# Altium PCB pneu-io.PcbDoc
Units mil, origin at the board's own origin, x right, y up, seen from the top; angles counter-clockwise.
Board outline 1200 x 2000 mil, 2 copper layers (Top, Bottom); 27 components, 28 nets, 114 pads, 76 vias.
Unrouted connection lines stored in the file: 14.
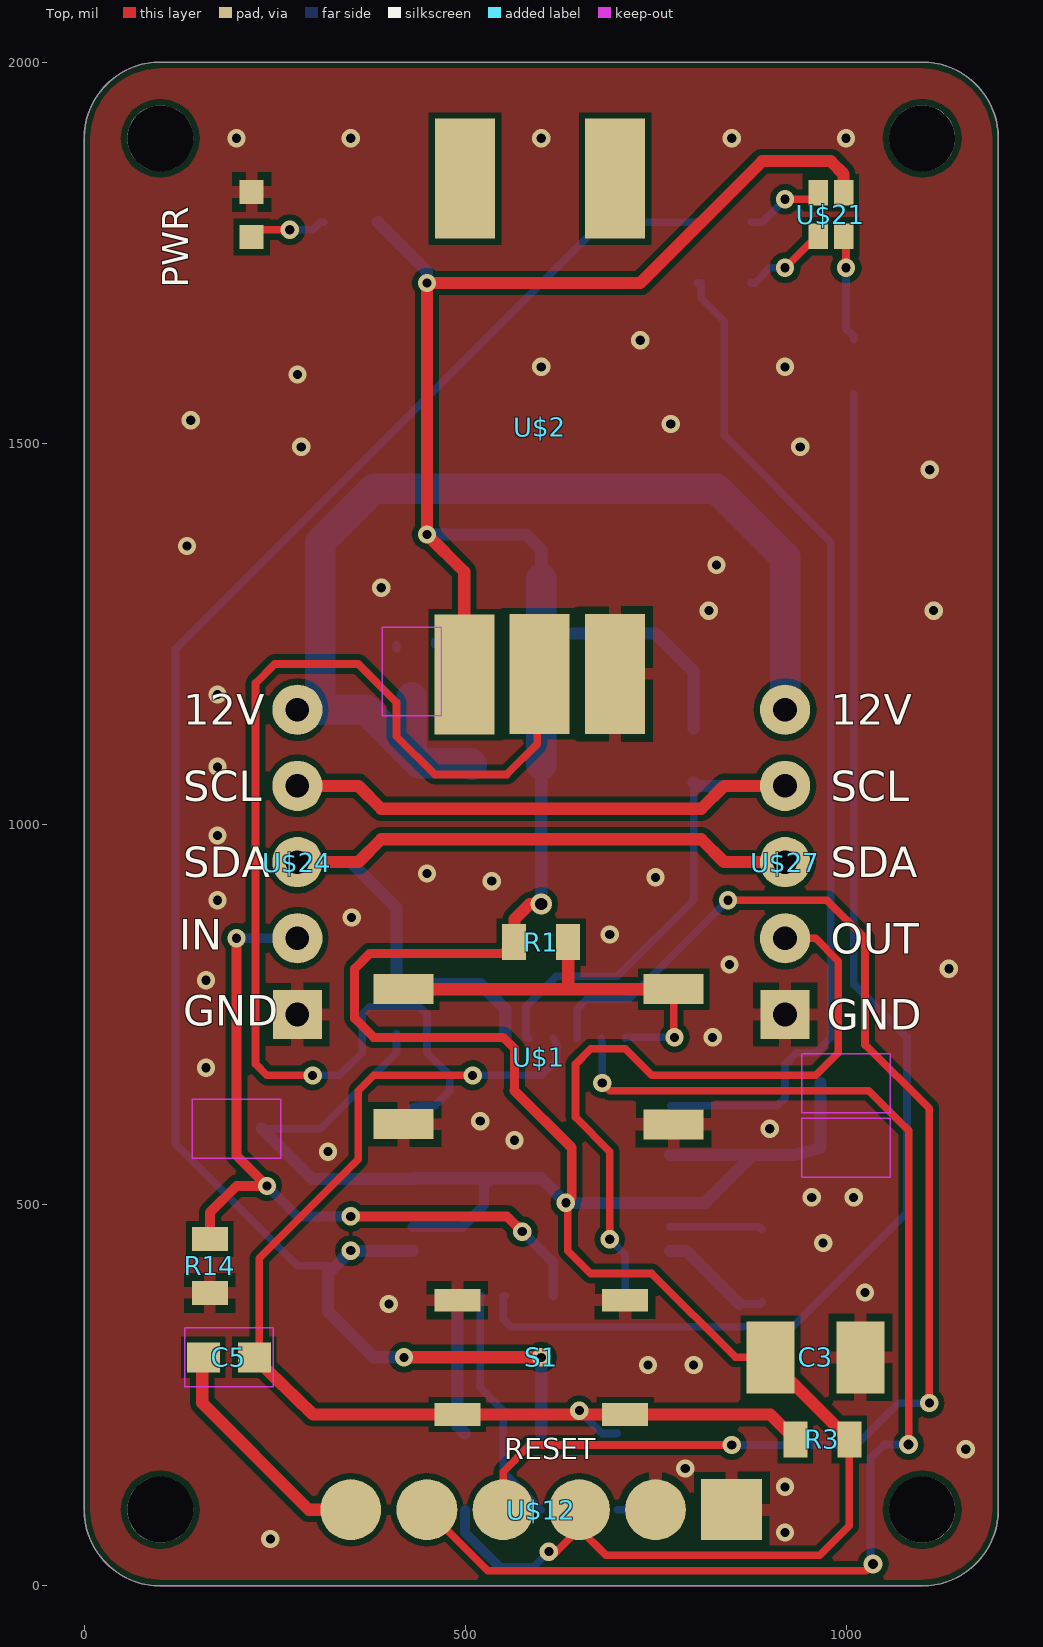
[diagram p0: Top view]
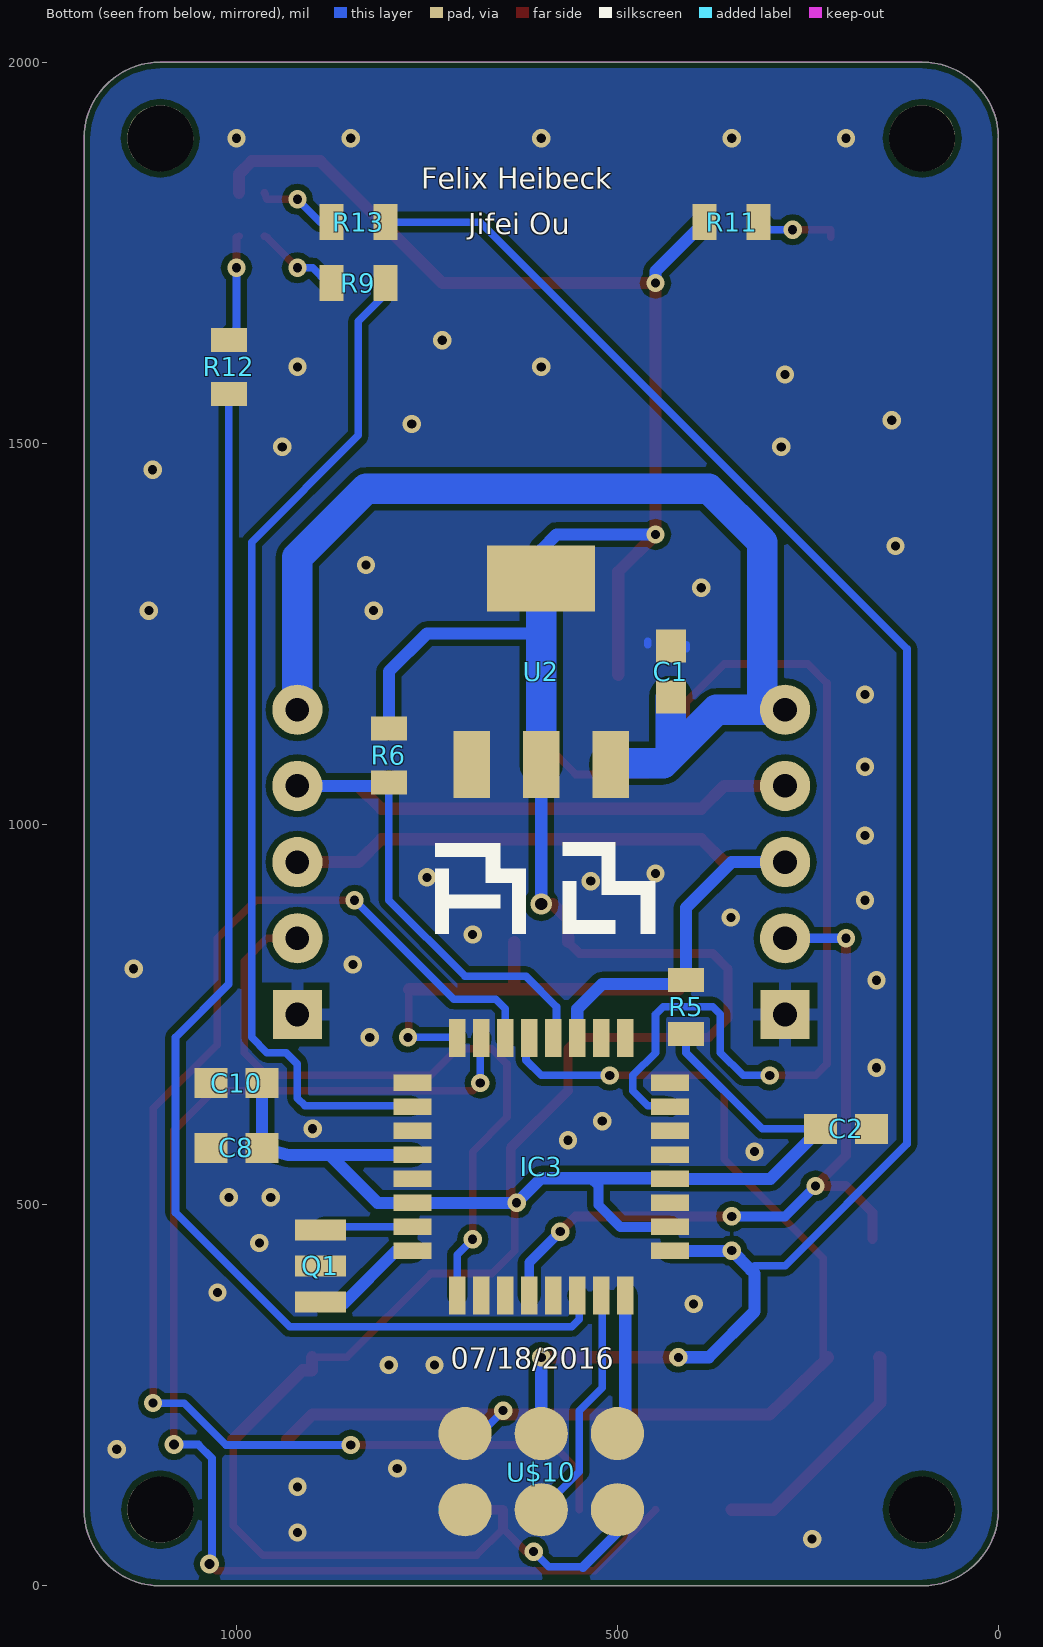
[diagram p1: Bottom view, seen from below]

## Layer stack, top to bottom
Top Solder: solder mask 0.4, Solder Resist, Dk 3.5
Top: signal copper 1.378
Dielectric 1: dielectric 12.6, FR-4, Dk 4.8
Bottom: signal copper 1.378
Bottom Solder: solder mask 0.4, Solder Resist, Dk 3.5

## Board outline
100,0 1100,0 ccw(c1100,100) 1200,100 1200,1900 ccw(c1100,1900) 1100,2000 100,2000 ccw(c100,1900) 0,1900 0,100 ccw(c100,100)

## Design rules (kind name [scope] priority, off if disabled: settings)
Clearance "Clearance (Same Net)" [All] p1: gap=8 ignorepadtopadclearanceinfootprint=FALSE except(0: SMDPad-SMDPad SMDPad-THPad SMDPad-Via)
Clearance [All] p2: gap=8 ignorepadtopadclearanceinfootprint=FALSE
HoleSize HoleSize_For_NetClass_vcc [InNetClass('vcc')] p1: absolutevalues=TRUE maxlimit=0 minlimit=0 maxpercent=80.000 minpercent=20.000
HoleSize [All] p2: absolutevalues=TRUE maxlimit=100000 minlimit=12 maxpercent=80.000 minpercent=20.000
HoleToHoleClearance mdDrill [All] p1: gap=10 allowstackedmicrovias=TRUE
PasteMaskExpansion mlMinCreamFrame [All] p1: expansion=0
PolygonConnect ThermalVias [IsVia] p1: connectstyle=Direct reliefconductorwidth=10 reliefentries=4 polygonreliefangle="90 Angle" airgapwidth=10
PolygonConnect [All] p2: connectstyle=Relief reliefconductorwidth=16 reliefentries=4 polygonreliefangle="90 Angle" airgapwidth=10
RoutingVias [All] p1: holewidth=12 width=24 viastyle="Through Hole" minholewidth=12 minwidth=24 maxholewidth=100 maxwidth=100
SolderMaskExpansion mlMinStopFrame [All] p1: expansion=2
Width Width_For_NetClass_vcc [InNetClass('vcc')] p1: maxlimit=10 minlimit=10 preferedwidth=10
Width [All] p2: maxlimit=10000 minlimit=10 preferedwidth=10
27 further rules are at their usual default settings.

## Components (designator, comment, footprint, x,y, rotation, side; value= is the part's Value field where it differs from the comment)
C1 "0.1uF" 0603-CAP#1 330,1200 r270 bottom
C2 "0.1uF" 0603-CAP#2 100,600 r180 bottom
C3 "22uF" SMC_B 860,300 r0 top
C5 "0.1uF" 0603-CAP#3 90,300 r180 top
C8 "0.1uF" 0603-CAP#4 900,575 r0 bottom
C10 "0.1uF" 0603-CAP#4 900,660 r0 bottom
IC3 "" TQFP32-08 500,550 r180 bottom
PWR "" CHIPLED_0603 120,1800 r0 top
Q1 "16Mhz" RESONATOR-SMD 790,420 r270 bottom
R1 "10K" 0805#1 500,845 r0 top
R3 "10K" 0805#2 868.89,192.21 r180 top
R5 "4.7k" 0805#3 310,760 r270 bottom
R6 "4.7k" 0805#3 700,1090 r270 bottom
R9 "1k" 0805#2 740,1710 r180 bottom
R11 "1k" 0805#1 250,1790 r0 bottom
R12 "1k" 0805#4 910,1600 r90 bottom
R13 "1k" 0805#2 740,1790 r180 bottom
R14 "10k" 0805#3 65,420 r90 top
S1 "" TACTILE-SWITCH-SMD 500,300 r0 top
U2 "" LINEAR_SOT223 500,1200 r180 bottom
U$1 "" SWITCH-11MM 495,695 r0 top
U$2 "" PRS11S 500,1535 r0 top
U$10 "" POGO_ISP 500,150 r90 bottom
U$12 "" FTDI_POGO 500,100 r0 top
U$21 "" LTST 880,1800 r0 top
U$24 "" 1X05_TIGHT 180,950 r90 top
U$27 "" 1X05_TIGHT 820,950 r90 top

## Footprints (in the part's own frame and the unit in brackets; to place one, negate y for a bottom-side part, rotate by r counter-clockwise, add the part's x,y. Pads: shape width x height; smd on the part's side, far side on the other; paste and mask are expansions set on the pad)
1X05_TIGHT [mil] "1X05_TIGHT"
  round 66 / inner round 60 / far side round 66 hole 31: P$1(200,-100) P$2(0,-100) P$3(100,-100) P$4(-100,-100)
  rect 63.9x63.9 / inner rect 60x60 / far side rect 63.9x63.9 hole 31: P$5(-200,-100)
0603-CAP#1 [mm] "0603-CAP"
  rect 1.1x1 smd: 1(-0.85,-2.54) 2(0.85,-2.54)
  Bottom keep-out lines w0.051: 1.473,-1.557 1.473,-3.523 -1.473,-3.523 -1.473,-1.557 1.473,-1.557
0603-CAP#2 [mm] "0603-CAP"
  rect 1.1x1 smd: 1(-3.39,0) 2(-1.69,0)
  Bottom keep-out lines w0.051: -1.067,-0.983 -4.013,-0.983 -4.013,0.983 -1.067,0.983 -1.067,-0.983
0603-CAP#3 [mm] "0603-CAP"
  rect 1.1x1 smd: 1(-3.39,0) 2(-1.69,0)
  Top keep-out lines w0.051: -1.067,0.983 -1.067,-0.983 -4.013,-0.983 -4.013,0.983 -1.067,0.983
0603-CAP#4 [mm] "0603-CAP"
  rect 1.1x1 smd: 1(1.69,0) 2(3.39,0)
  Bottom keep-out lines w0.051: 1.067,0.983 1.067,-0.983 4.013,-0.983 4.013,0.983 1.067,0.983
0805#1 [mil] "0805"
  rect 31.5x47.24 smd: 1(64.57,0) 2(135.43,0)
0805#2 [mil] "0805"
  rect 31.5x47.24 smd: 1(-135.43,0) 2(-64.57,0)
0805#3 [mil] "0805"
  rect 31.5x47.24 smd: 1(-35.43,-100) 2(35.43,-100)
0805#4 [mil] "0805"
  rect 31.5x47.24 smd: 1(-35.43,100) 2(35.43,100)
CHIPLED_0603 [mil] "CHIPLED_0603"
  rect 31.5x31.5 smd: A(100,-29.53) C(100,29.53)
FTDI_POGO [mil] "FTDI_POGO"
  rrect100% 80x80 smd: 1(-150,0) 2(-50,0) 3(50,0) 4(150,0) 5(250,0)
  rect 80x80 smd: 6(350,0)
LINEAR_SOT223 [mil] "LINEAR_SOT223"
  rect 48x88 smd: 1(-191,-122) 2(-100,-122) 3(-9,-122)
  rect 141.73x86.61 smd: 4(-100,122.01)
LTST [mm] "LTST"
  rect 0.65x0.85 smd: +(2.965,0.725) B(2.115,0.725) G(2.965,-0.725) R(2.115,-0.725)
POGO_ISP [mil] "POGO_ISP"
  rrect100% 70x70 smd: 1(-50,200) 2(50,200) 3(-50,100) 4(50,100) 5(-50,0) 6(50,0)
PRS11S [mm] "PRS11S"
  rect 2x4 smd: 1(-0.025,-8.611) 2(2.489,-8.585) 3(5.004,-8.585) 4(0,7.925) 5(5.004,7.925)
RESONATOR-SMD [mil] "RESONATOR-SMD"
  rect 27.56x66.93 smd: 1(-47.24,-100) 2(0,-100) 3(47.24,-100)
SMC_B [mil] "SMC_B"
  rect 62.99x94.49 smd: +(40.94,0) -(159.06,0)
SWITCH-11MM [mm] "SWITCH-11MM"
  rect 2x1 smd: A(-1.92,2.24) B(-1.92,-2.26) D(7.08,-2.27) H(7.08,2.24)
TACTILE-SWITCH-SMD [mil] "TACTILE-SWITCH-SMD"
  rect 60x30 smd: 1(-10,75) 2(210,75) 3(-10,-75) 4(210,-75)
TQFP32-08 [mil] "TQFP32-08"
  rect 50x22 smd: 1(-269,110.24) 2(-269,78.74) 3(-269,47.24) 4(-269,15.75) 5(-269,-15.75) 6(-269,-47.24) 7(-269,-78.74) 8(-269,-110.24) 17(69,-110.24) 18(69,-78.74) 19(69,-47.24) 20(69,-15.75) 21(69,15.75) 22(69,47.24) 23(69,78.74) 24(69,110.24)
  rect 22x50 smd: 9(-210.24,-169) 10(-178.74,-169) 11(-147.24,-169) 12(-115.75,-169) 13(-84.25,-169) 14(-52.76,-169) 15(-21.26,-169) 16(10.24,-169) 25(10.24,169) 26(-21.26,169) 27(-52.76,169) 28(-84.25,169) 29(-115.75,169) 30(-147.24,169) 31(-178.74,169) 32(-210.24,169)

## Part data
C1 C2 C5 C8 C10: library part 0603-CAP, PackageName=0603-CAP
C3: library part SMC_B, PackageName=SMC_B
IC3: library part TQFP32-08, PackageName=TQFP32-08
PWR: library part CHIPLED_0603, PackageName=CHIPLED_0603
Q1: library part RESONATOR-SMD, PackageName=RESONATOR-SMD
R1 R3 R5 R6 R9 R11 R12 R13 R14: library part 0805, PackageName=0805
S1: library part TACTILE-SWITCH-SMD, PackageName=TACTILE-SWITCH-SMD
U2: library part LINEAR_SOT223, PackageName=LINEAR_SOT223
U$1: library part SWITCH-11MM, PackageName=SWITCH-11MM
U$2: library part PRS11S, PackageName=PRS11S
U$10: library part POGO_ISP, PackageName=POGO_ISP
U$12: library part FTDI_POGO, PackageName=FTDI_POGO
U$21: library part LTST, PackageName=LTST
U$24 U$27: library part 1X05_TIGHT, PackageName=1X05_TIGHT

## Free pads (board coordinates)
  round 86.61 hole 86.61 unplated: MH1(100,1900) MH2(1100,1900) MH3(1100,100) MH4(100,100)

## Via types
v1: diameter 24/24 (per signal layer), hole 12, Top to Bottom, tented both sides, 73 vias
v2: diameter 25/25 (per signal layer), hole 13, Top to Bottom, tented both sides, 2 vias
v3: diameter 28/28 (per signal layer), hole 16, Top to Bottom, tented both sides, 1 vias

## Nets (pads, with @x,y where several pads share a name; then routed paths per layer and width w, separated by ;. In a path a pad name is that pad's centre, name@x,y a point inside that pad or via, vN(x,y) a via of type N, cw(c..) or ccw(c..) an arc to the next point about the centre after c; other vN are vias at no path point)
+5V: C2.1 C3.+ C8.1 C10.1 IC3.4 IC3.6 IC3.18 IC3.20 R1.1 R3.1 R5.1 R6.2 R11.2 U2.2 U2.4 U$2.1 U$10.2 U$12.4 U$21.+ | length 5721.7
  Top w10: v1(610,45) 620,45 650,75 685,40 965.47,40 1004.35,78.88 R3.1@1004.35,192.18 ; v1(632.3,502.81) 635,500.1 635,440 665,410 745,410 855,300 C3.+
  Top w12: 564.57,650.43 565,650.43 565,705 550,720 380,720 355,745 355,810 375,830 549.57,830 R1.1
  Top w13: 564.57,650.43 640,575 640,510.51 v1(632.3,502.81) ; U$12.4@650,75 U$12.4 U$12.4@670,100
  Top w16: U$2.1 499,1331 v1(450,1380) v1(450,1710) 730,1710 890,1870 980,1870 996.73,1853.27 U$21.+ ; R1.1 565,860.43 565,875 585,895 v3(600,895) ; C3.+ 900.94,283.06 913.48,283.06 R3.1
  Bottom w10: C2.1 310,600 410,700 410,724.57 ; 545,25 590,25 v1(610,45)
  Bottom w13: IC3.18 496.26,471.26 525,500 525,525 535,535 ; 500,100 500,70 545,25
  Bottom w16: C2.1 299.21,534.25 IC3.20 431.75,535 535,535 600,535 v1@632.24,502.76 ; R11.2 450,1725.43 v1(450,1710) ; v1(450,1380) 580,1380 600,1360 U2.4 ; v3(600,895) U2.2 ; 600,1250 750,1250 800,1200 800,1125.43 ; v1(632.3,502.81) v1@632.24,502.76 ; IC3.4 878,565.75 ; C10.1 C8.1 932.28,565.75 878,565.75 ; v1@632.24,502.76 IC3.6 815.01,502.76 878,565.75
  Bottom w40: U2.2 600,1250 U2.4
A0/POT: IC3.23 U$2.2 | length 1661.8
  Top w10: v1(300,670) 240,670 225,685 225,1185 250,1210 360,1210 410,1160 410,1115 460,1065 555,1065 595,1105 595,1194 U$2.2 590,1260 U$2.2@590,1210
  Bottom w10: v1(300,670) 335,670 365,700 365,750 375,760 440,760 450,750 450,700 480,670 480,650 460,630 440,630 IC3.23
D2/BTN: IC3.32 R1.2 U$1.A U$1.H | length 546.9
  Top w10: U$1.H 773.74,721.26 v1(775,720)
  Top w16: U$1.A 640,783.19 ; R1.2 635.43,787.76 640,783.19 ; U$1.H 640,783.19
  Bottom w10: IC3.32 711.24,720 v1(775,720)
D3/BTN: IC3.1
D4: IC3.2 R9.2 | length 1339.5
  Bottom w10: IC3.2@770,630 910,630 920,640 920,685 935,700 960,700 980,720 980,780 980,1370 840,1510 840,1660 810,1690 810,1710 R9.2
D5/OUT: IC3.9 U$27.P$4 | length 913.7
  Top w10: v1(690,455) 690,570 645,615 645,685 665,705 710,705 745,670 960,670 990,700 990,820 960,850 U$27.P$4
  Bottom w10: v1(690,455) 710.24,434.76 IC3.9
D6: IC3.10
D7: IC3.11
D8: IC3.12 R14.2 U$24.P$4 | length 1006.4
  Top w13: R14.2 165,490 200,525 v1(240,525) 200,565 v1(200,850) ; v1(350,485) 555,485 v1(575,465)
  Bottom w13: v1(200,850) U$24.P$4 ; v1(240,525) 280,485 v1(350,485) ; v1(575,465) 615.75,424.25 IC3.12
D9: IC3.13
D10: IC3.14 R12.2 | length 1732.8
  Bottom w10: IC3.14 550,380 550,350 560,340 930,340 1080,490 1080,720 1010,790 1010,1564.57
DTR: C5.2 U$12.1 | length 314.2
  Top w16: C5.2 155,299.57 155,240 295,100 U$12.1
GND: C1.2 C2.2 C3.- C8.2 C10.2 IC3.3 IC3.5 IC3.21 PWR.C Q1.2 R14.1 S1.1 S1.2 U2.1 U$1.B U$1.D U$2.3 U$10.6 U$12.5 U$12.6 U$24.P$5 U$27.P$5 | length 40
  Bottom w10: 410,1230 410,1235.31 ; 460,1235.31 460,1240 ; 700,100 730,100
  other v1: 244.43,61.67 920,70 920,130 789,154 1157.22,179.43 740,290 800,290 400,370 1025,385 970,450 955,510 1010,510 320,570 565,585 900,600 520,610 160,680 825,720 160,795 1135,810 847.22,815.55 690,855 351.12,877.23 175,900 535,925 750,930 450,935 175,985 175,1075 175,1170 820,1280 1115,1280 390,1310 830,1340 135,1365 1110,1465 285,1495 940,1495 770,1525 140,1530 280,1590 600,1600 920,1600 730,1635 200,1900 350,1900 600,1900 850,1900 1000,1900
MISO: IC3.16 U$10.1 | length 185.2
  Bottom w16: IC3.16 489.76,210.24 500,200
MOSI: IC3.15 U$10.4 | length 314.7
  Bottom w10: IC3.15 520,380 520,260 550,230 550,150 600,100
N$4: IC3.8 Q1.1 | length 151
  Bottom w10: 860,370 887.24,370 890,372.76
  Bottom w16: IC3.8 790.24,439.76 860,370
N$8: IC3.7 Q1.3 | length 122.7
  Bottom w10: IC3.7 885.98,471.26 890,467.24
N$10: PWR.A R11.1 | length 108.2
  Top w10: PWR.A 220,1780 v1(270,1780)
  Bottom w10: v1(270,1780) 300,1780 310,1790 R11.1
N$11: R9.1 U$21.R | length 113
  Top w10: v1(920,1730) 960,1770 U$21.R
  Bottom w10: R9.1 880,1710 900,1730 v1(920,1730)
N$12: R12.1 U$21.G | length 142.3
  Top w10: U$21.G 1000,1770 v1(1000,1730)
  Bottom w10: v1(1000,1730) 1000,1650 1010,1640 1010,1635.43
N$13: R13.1 U$21.B | length 106.1
  Top w10: v1(920,1820) 960,1820 U$21.B
  Bottom w10: R13.1 890,1790 v1(920,1820)
RESET: C5.1 IC3.29 R3.2 S1.3 S1.4 U$10.5 | length 1538.4
  Top w10: C5.1 230,300 230,430 360,560 360,650 380,670 v1(510,670) ; v1@650,225 v1(650,230)
  Top w16: C5.1 300.43,225 S1.3 650,225 S1.4 900.67,225 R3.2
  Bottom w10: v1(510,670) 600,670 620,690 620,710 IC3.29 ; v1(650,230) 680,200 700,200
RX: IC3.30 U$12.3 | length 1787.9
  Top w10: U$12.3 550,150 585,185 v1(850,185) ; v1(845,900) 975,900 1025,850 1025,710 1109.44,626.67 v1(1109.44,240)
  Bottom w10: IC3.30 647.24,757.24 660,770 715,770 v1(845,900) ; v1(850,185) 1013.82,185 1068.79,239.98 1104.98,239.98 v1(1109.44,240)
SCK: IC3.17 R13.2 U$10.3 | length 2499.2
  Top w16: v1(420,300) v1(600,300)
  Bottom w10: 325,415 320,420 280,420 120,580 120,1230 680,1790 R13.2
  Bottom w16: v1(350,440) 350.24,439.76 IC3.17 349.76,439.76 325,415 320,410 320,360 380,300 v1(420,300) ; 600,200 v1(600,300)
SCL: IC3.28 R6.1 U$24.P$3 U$27.P$3 | length 1263.7
  Top w16: U$24.P$3 360,1050 390,1020 810,1020 840,1050 U$27.P$3
  Bottom w10: IC3.28 580,720 580,760 620,800 700,800 800,900 800,1054.57
  Bottom w16: 800,1054.57 804.57,1050 U$27.P$3
SDA: IC3.27 R5.2 U$24.P$2 U$27.P$2 | length 1111.1
  Top w16: U$24.P$2 360,950 390,980 810,980 840,950 U$27.P$2
  Bottom w16: U$24.P$2 350,950 410,890 410,795.43 415.43,790 520,790 552.76,757.24 IC3.27
TX: IC3.31 U$12.2 | length 1719.3
  Top w10: U$12.2 530,20 1026.67,20 v2(1035.55,28.89) ; v1(680,660) 690,650 1030,650 1070,610 1070,609.84 1082.12,597.72 v2(1082.12,185.54)
  Bottom w10: IC3.31 680,710 v1(680,660) ; v2(1035.55,28.89) 1032.13,32.31 1032.13,167.76 1049.91,185.54 v2(1082.12,185.54)
VIN: C1.1 U2.3 U$24.P$1 U$27.P$1 | length 1437.7
  Bottom w16: U2.3 510,1078 U2.3@510,1070
  Bottom w40: U$24.P$1 U$24.P$1@310,1150 ; 430,1166.54 430,1100 425,1095 ; U2.3 507,1080 440,1080 425,1095 ; U$27.P$1 920,1350 830,1440 380,1440 310,1370 U$24.P$1@310,1150 ; U$24.P$1@310,1150 370,1150 425,1095
pads on no net: IC3.19 IC3.22 IC3.24 IC3.25 IC3.26 U$2.4 U$2.5

## Polygon pours and split planes (outlines as drawn)
GND on Bottom "Polygon_1_Net_GND" (solid, remove dead copper, pour order 0): 2,2177.93 1218,2188.07 1218,-117.93 2,-128.07
GND on Top "Polygon_2_Net_GND" (solid, remove dead copper, pour order 1): -48,2148 1218,2148 1218,-98 -48,-98

## Keep-outs
Keep-Out Layer:
  the board outline again, w0

## Silkscreen, mask and mechanical layers (free items; w line width, h text height)
Top Overlay:
  text "12V" at 130,1130 h40
  text "12V" at 980,1130 h40
  text "SCL" at 130,1030 h40
  text "SCL" at 980,1030 h40
  text "SDA" at 130,930 h40
  text "SDA" at 980,930 h40
  text "IN" at 125,835 h40
  text "OUT" at 980,830 h40
  text "GND" at 130,735 h40
  text "GND" at 975,730 h40
  text "RESET" at 551.66,156.74 h46.5
Bottom Overlay:
  drawing of 354 lines, arcs and shapes, not listed
  text "Felix Heibeck" at 757.66,1824.72 h46.5
  text "Jifei Ou" at 695.48,1764.72 h46.5
  text "07/18/2016" at 718.89,275.62 h46.5
Dimension:
  the board outline again, w0
Top Assembly:
  text "STATUS" at 1065.61,1706.44 h62 r90
Unrouted:
  lines w0: 769,628.74 770,630

## Text inside footprints (layer, text, board x,y; h text height)
U2: Top Assembly "2" at 650.81,1029.63 h49.6; Top Assembly "1" at 735.93,1030 h49.6; Top Assembly "4" at 525,1300 h49.6; Top Assembly "3" at 559.81,1030 h49.6
U$10: Top Assembly "ISP" at 750,120 h49.6 r270